# Altium PCB acqboard 3.0.PcbDoc (part 2 of 4)
Units mil, origin at the board's own origin, x right, y up, seen from the top; angles counter-clockwise.
Board outline 6000 x 4000 mil, 4 copper layers (Top Layer, Internal Plane 1, Internal Plane 2, Bottom Layer); 450 components, 328 nets, 1980 pads, 745 vias.
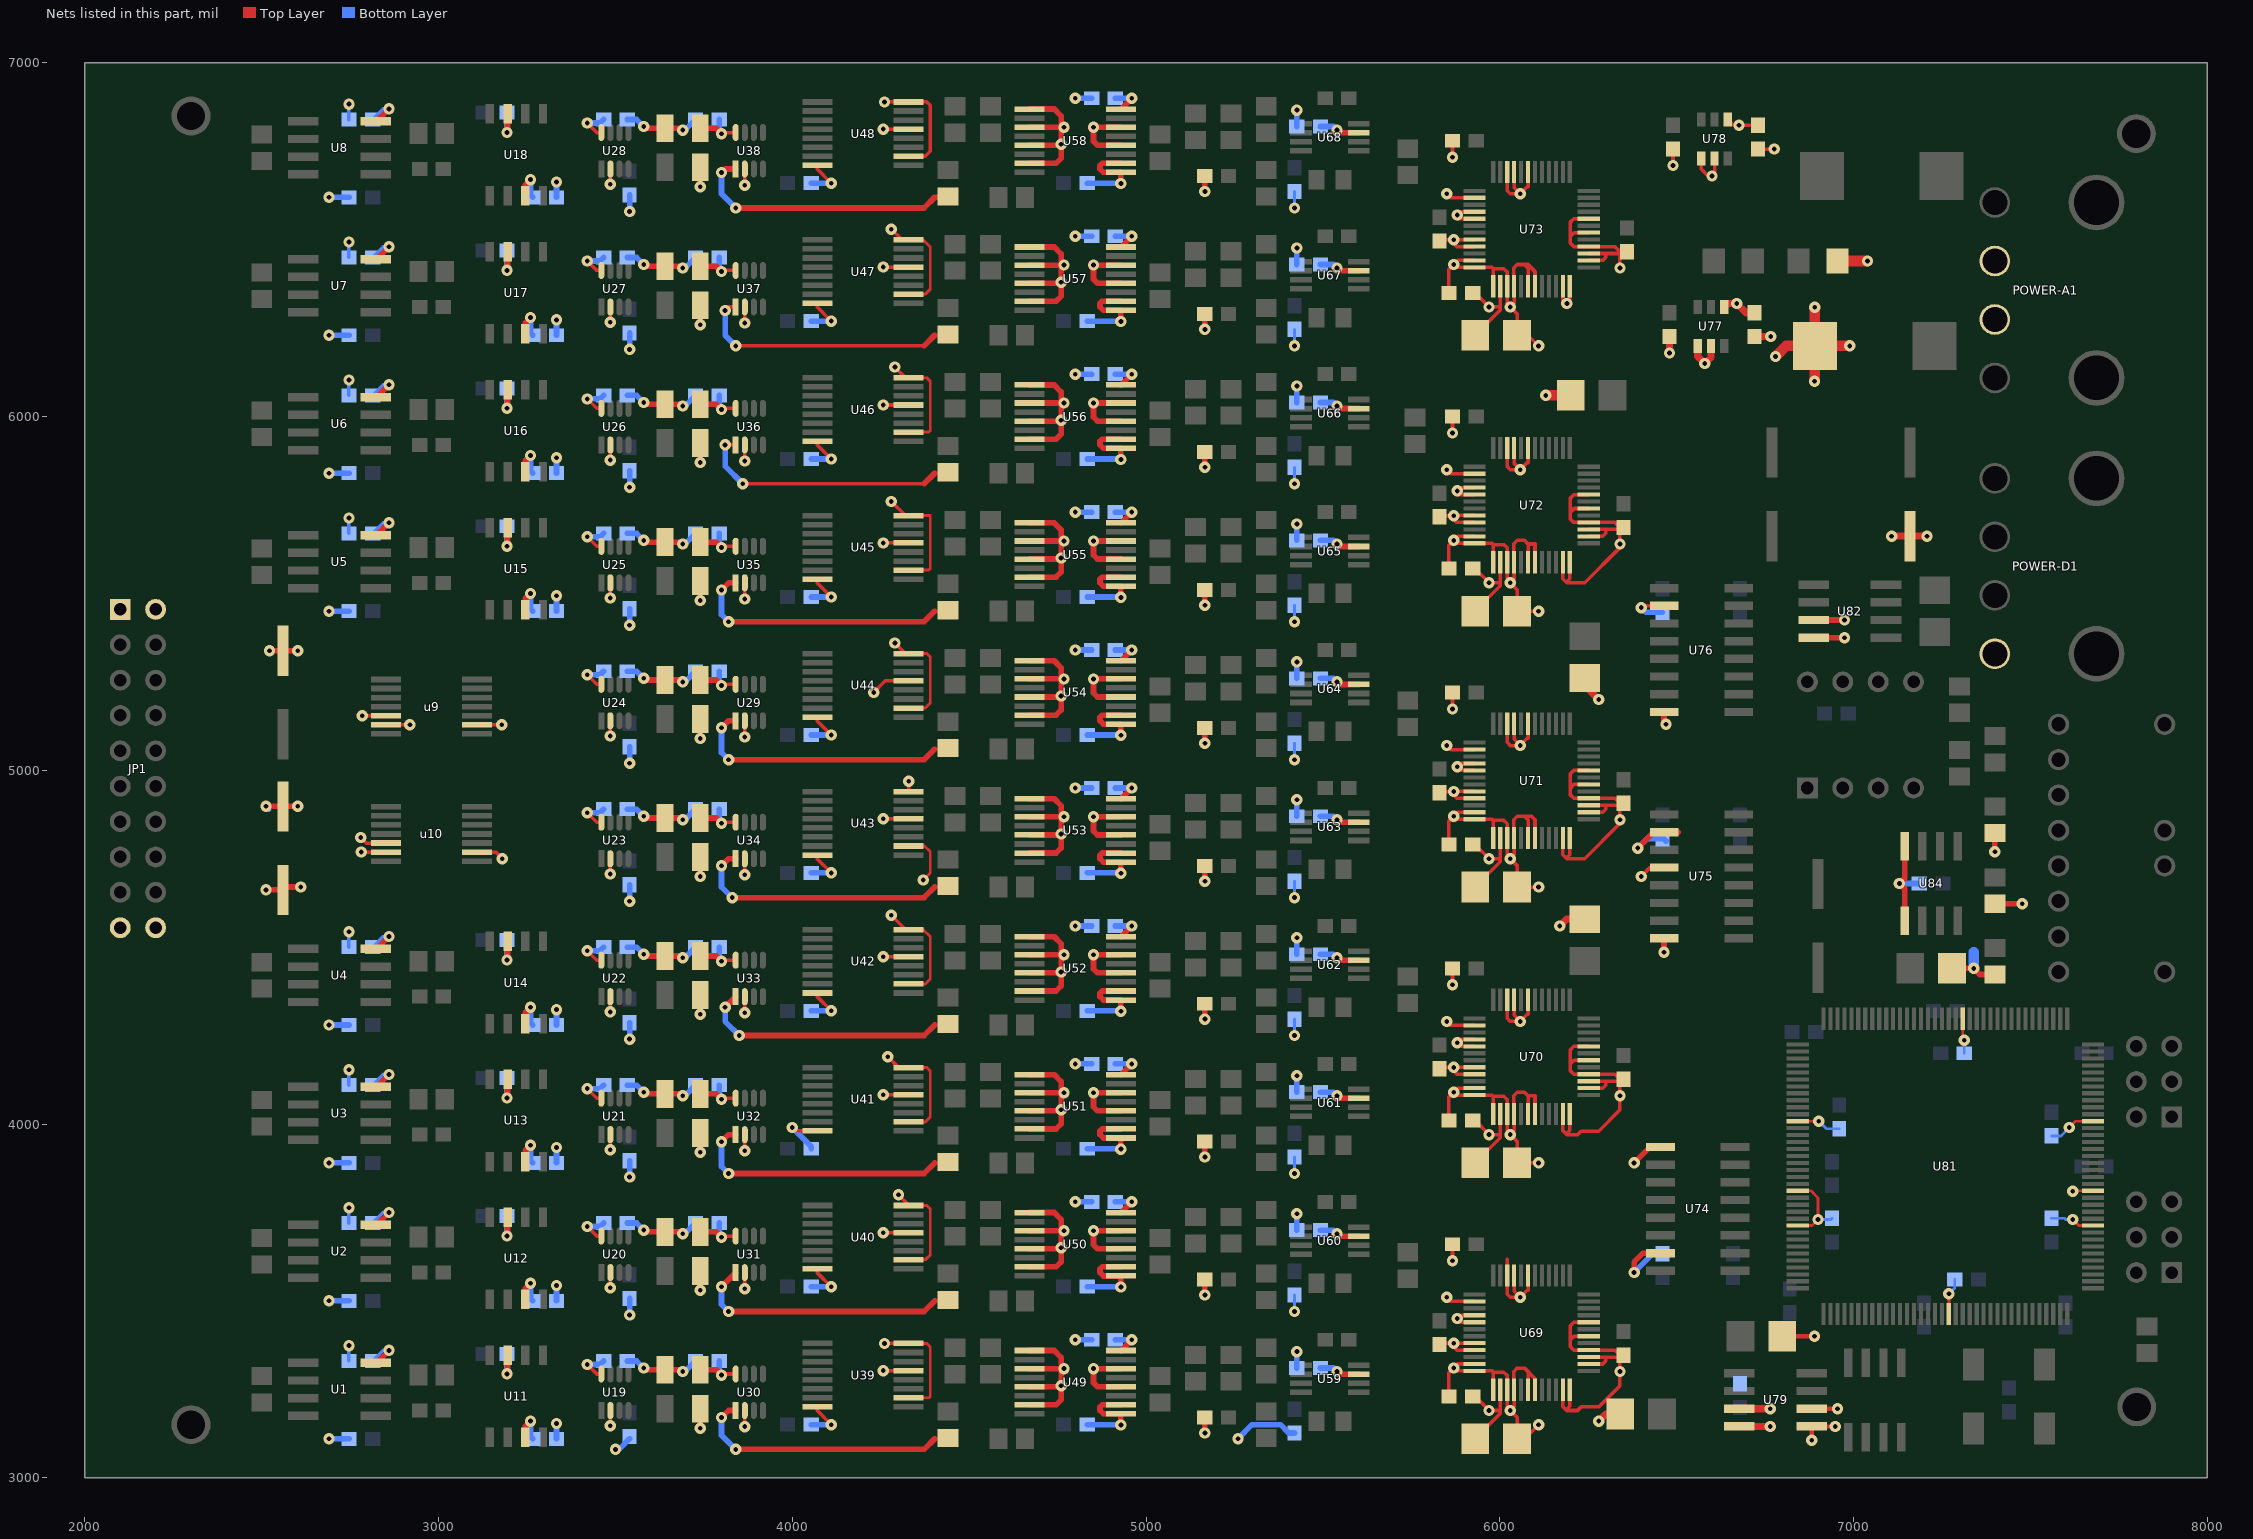
[diagram p4: the nets of this part, all layers, seen from the top]

## Footprints (in the part's own frame and the unit in brackets; to place one, negate y for a bottom-side part, rotate by r counter-clockwise, add the part's x,y. Pads: shape width x height; smd on the part's side, far side on the other; paste and mask are expansions set on the pad) (continued)
TC3528-1411 [mm]
  rect 2x2.2 smd: 1(-1.5,0) 2(1.5,0)
  silkscreen extent -2.9,-1.5 2.4,1.5
TSOT-23-8 [mm]
  rect 1.22x0.43 smd: 1(0,0)
  oval 1.22x0.43 smd: 2(0,-0.65) 3(0,-1.3) 4(0,-1.95) 5(2.62,-1.95) 6(2.62,-1.3) 7(2.62,-0.65) 8(2.62,0)
  silkscreen extent 0.9,-2.35 1.75,0.25
TSSO3X5-G8/X.4 [mm]
  rect 0.4x1.55 smd: 1(-0.975,-2.075) 2(-0.325,-2.075) 3(0.325,-2.075) 4(0.975,-2.075) 5(0.975,2.075) 6(0.325,2.075) 7(-0.325,2.075) 8(-0.975,2.075)
  silkscreen extent -1.85,-2.2 1.55,0.9

## Part data
C1 C2 C92 C96: library part "Cap Pol3", "Polarized Capacitor (Surface Mount)"
C3 C4 C5 C6 C7 C8 C9 C10 C31 C32 C33 C34 C35 C36 C37 C38 C39 C40 C42 C44 C46 C48 C50 C52 C54 C56 C58 C60 C61 C62 C63 C64 C65 C67 C68 C70 C71 C73 C74 C76 C77 C79 C80 C85 C86 C87 C88 C89 C90 C91 C94 C95 C100 C101 C102 C103 C104 C105 C106 C107 C108 C109 C110 C111 C112 C113 C114 C115 C116 C117 C118 C119 C120 C121 C122 C123 C124 C125 C126 C127 C128 C129 C130 C131 C132 C133 C134 C135 C136 C137 C138 C139 C140 C141 C142 C143 C144 C145 C146 C147 C148 C149 C150 C151 C152 C153 C154 C155 C156 C157 C158 C159 C160 C161 C162 C163 C164 C165 C166 C167 C168 C169 C170 C171 C172 C173 C174 C175 C176 C177 C178 C179 C180 C181 C182 C183 C184 C185 C186 C187 C188 C189 C190 C191 C192 C193 C194 C195 C196 C197 C198 C199 C200 C201 C202 C203 C204 C205 C206 C207 C208 C209 C210 C211 C212 C213 C214 C215 C216 C217 C218 C219 C220 C221 C222 C223 C224 C225 C226 C227 C228 C229 C230 C231 C232 C233 C234 C235 C236: "Capacitor"
C11 C12 C13 C14 C15 C16 C17 C18 C19 C20 C21 C22 C23 C24 C25 C26 C27 C28 C29 C30 C66 C69 C72 C75 C78 C81 C82 C83 C84 C93 C97 C98 C99: library part Cap2, "Capacitor"
C41 C43 C45 C47 C49 C51 C53 C55 C57 C59: library part Cap, "Capacitor"
JP1: "Header, 10-Pin, Dual row, Right Angle"
JP2 JP3: "Header, 3-Pin, Dual row"
L1 L2 L3: library part Inductor, "Inductor"
O1: "Epson CMOS/TTL Oscillator"
O2: "Low-cost fiber transmitter"
O3: "Low-cost fiber receiver"
POWER-A1 POWER-D1: "Header, 4-Pin"
R1 R2 R3 R4 R5 R6 R7 R8: library part Res1, "Resistor"
R9 R10 R11 R12 R13 R14 R15 R16 R17 R18 R19 R20 R21 R22 R23 R24 R25 R26 R27 R28 R29 R30 R31 R32 R33 R34 R35 R36 R37 R38 R39 R40 R41 R42 R43 R44 R45 R46 R47 R48 R49 R50 R51 R52 R53 R54 R55 R56 R57 R58 R59 R60 R61 R62 R63 R64 R65 R66 R67 R68 R69 R70 R71 R72 R73 R74 R75 R76 R77 R78 R79 R80 R81 R82 R83 R84 R85 R86 R87 R88 R89 R90 R91 R92 R93 R94 R95 R96 R97 R98 R99 R100 R101 R102 R103 R104 R105 R106 R107 R108 R109 R110 R111 R112 R113 R114 R115 R116 R117 R118 R119: "Resistor"
U1 U2 U3 U4 U5 U6 U7 U8: "AD8221 Precision Instrumentation Amplifier"
u9 u10: "1 pC Charge Injection 100pA leakage CMOS 4-channel mux"
U11 U12 U13 U14 U15 U16 U17 U18: library part OPA227UA, "OPA227UA"
U19 U20 U21 U22 U23 U24 U25 U26 U27 U28 U29 U30 U31 U32 U33 U34 U35 U36 U37 U38: "LTI Digitally Controlled Programmabe Gain Amp"
U39 U40 U41 U42 U43 U44 U45 U46 U47 U48: library part SN74LV595APWR, "8-bit shift register with 3-state output"
U49 U50 U51 U52 U53 U54 U55 U56 U57 U58: "Linear Tech 4-th order linear continuous filter"
U59 U60 U61 U62 U63 U64 U65 U66 U67 U68: library part AD8021, "AD Low-noise, High-Speed Amp for 16-bit applications"
U69 U70 U71 U72 U73: library part AD7655, "AD 4 Channel 1 MSPS 16-bit ADC"
U74 U76: library part IL715-3, "High speed digital coupler"
U75: library part IL716-3, "High speed digital coupler"
U77 U78: library part LT1790
U79 U82: library part TPS775XX, "Fast-transient-response 500 mA low-dropout voltage regulator"
U80: "Xilinx OTP configuration serial prom"
U81: "Xilinx Spartan-IIE 1.8 V FPGA TQ144"
U83: "32K I2C Serial EEPROM"
U84: "Dual Peripheral Driver"

## Free pads (board coordinates)
  round 110 hole 80: 0(2300,3150) 0(2300,6850) 0(7800,6800) 0(7801,3200)

## Via types
v1: diameter 32, hole 13.5, Top Layer to Bottom Layer, 745 vias

## Nets (pads, with @x,y where several pads share a name; then routed paths per layer and width w, separated by ;. In a path a pad name is that pad's centre, name@x,y a point inside that pad or via, vN(x,y) a via of type N, cw(c..) or ccw(c..) an arc to the next point about the centre after c; other vN are vias at no path point)
+1.8VCC: C93.1 C221.1 C223.1 C228.1 C229.1 C232.1 C233.1 U79.5 U79.6 U81.19 U81.46 U81.51 U81.61 U81.88 U81.120 U81.130 U81.135 | length 1149.9
  Top Layer w8: U81.135@6842.68,3712.68 6882.68,3712.68 v1(6900,3730) 6900,3791.1 6880,3811.1 U81.130@6842.68,3811.1 ; U81.120@6842.68,4007.95 v1(6902.05,4007.95) ; U81.19@7269.84,3462.68 7270,3462.84 v1(7270,3520) ; U81.88@7309.21,4297.32 7309.21,4240.79 v1(7313.46,4236.54) ; v1(7610,3990) 7627.95,4007.95 U81.61@7677.32,4007.95 ; v1(7620,3730) 7637.32,3712.68 U81.46@7677.32,3712.68 ; v1(7620,3810) 7621.1,3811.1 U81.51@7677.32,3811.1
  Top Layer w12: C93.1@6799.06,3400 v1(6890,3400) ; v1(6882.36,3105.64) U79.5@6882.36,3145 v1(6949,3145) ; U79.6@6882.36,3195 v1(6955,3195)
  Bottom Layer w8: v1(6900,3730) 6936.54,3730 C221.1@6940,3733.46 ; v1(6902.05,4007.95) 6923.46,3986.54 C223.1@6960,3986.54 ; v1(7270,3520) 7286.54,3536.54 C228.1@7286.54,3560 ; C229.1@7313.46,4200 v1(7313.46,4236.54) ; C232.1@7560,3733.46 7596.54,3733.46 7600,3730 v1(7620,3730) ; C233.1@7560,3966.54 7586.54,3966.54 v1(7610,3990)
+5VCC: C97.1 C98.1 C216.1 C227.1 POWER-D1.4 R113.2 R116.2 R117.1 U79.3 U79.4 U82.3 U82.4 U84.1 U84.8 | length 1032.4
  Top Layer w16: U82.4@6887.64,5375 v1(6975,5375) ; U82.3@6887.64,5425 v1(6975,5425) ; U84.1@7145,4574.69 7145,4665 v1(7130,4680) 7145,4695 U84.8@7145,4785.32 ; C98.1@7279.06,4440 v1(7340,4440) 7357.4,4422.6 R113.2@7400,4422.6 ; R116.2@7400,4622.6 v1(7477.4,4622.6) ; v1(7400,4770) R117.1@7400,4822.6
  Top Layer w20: U79.4@6677.64,3145 v1(6765,3145) ; U79.3@6677.64,3195 v1(6765,3195) ; v1(7108.11,5661.89) v1(7208.11,5661.89)
  Bottom Layer w16: v1(7130,4680) C227.1@7186.54,4680
  Bottom Layer w30: v1(7340,4440) 7340,4485.2
AAIN1: R35.1 U38.1 | length 770.5
  Top Layer w16: v1(3800,6690) 3810,6700 U38.1@3840,6700 ; v1(3840,6590) 4372.6,6590 4402.6,6620 R35.1@4437.4,6620
  Bottom Layer w16: v1(3800,6690) 3800,6630 v1(3840,6590)
AAIN2: R33.1 U37.1 | length 721.6
  Top Layer w10: v1(3810,6300) 3820,6310 U37.1@3840,6310 ; v1(3840,6200) 4372.6,6200
  Top Layer w16: 4372.6,6200 4402.6,6230
  Bottom Layer w16: v1(3810,6300) 3810,6230 v1(3840,6200)
AAIN3: R31.1 U36.1 | length 715.7
  Top Layer w10: v1(3810,5920) U36.1@3840,5920 ; v1(3860,5810) 4372.6,5810
  Top Layer w16: 4372.6,5810 4402.6,5840
  Bottom Layer w16: v1(3810,5920) 3810,5860 v1(3860,5810)
AAIN4: R29.1 U35.1 | length 741.6
  Top Layer w16: v1(3800,5510) 3820,5530 U35.1@3840,5530 ; v1(3820,5420) 4372.6,5420 4402.6,5450
  Bottom Layer w16: v1(3800,5510) 3800,5440 v1(3820,5420)
AAIN5: R27.1 U29.1 | length 741.6
  Top Layer w16: v1(3800,5120) 3820,5140 U29.1@3840,5140 ; v1(3820,5030) 4372.6,5030 4402.6,5060
  Bottom Layer w16: v1(3800,5120) 3800,5050 v1(3820,5030)
AAIN6: R25.1 U34.1 | length 735.7
  Top Layer w16: v1(3800,4730) 3820,4750 U34.1@3840,4750 ; v1(3830,4640) 4372.6,4640 4402.6,4670
  Bottom Layer w16: v1(3800,4730) 3800,4670 v1(3830,4640)
AAIN7: R23.1 U33.1 | length 704
  Top Layer w16: v1(3810,4330) U33.1@3840,4360 ; v1(3850,4250) 4372.6,4250 4402.6,4280
  Bottom Layer w16: v1(3810,4330) 3810,4290 v1(3850,4250)
AAIN8: R21.1 U32.1 | length 741.6
  Top Layer w16: v1(3800,3950) 3820,3970 U32.1@3840,3970 ; v1(3820,3860) 4372.6,3860 4402.6,3890
  Bottom Layer w16: v1(3800,3950) 3800,3880 v1(3820,3860)
AAIN9: R19.1 U31.1 | length 727.3
  Top Layer w16: v1(3800,3540) U31.1@3840,3580 ; v1(3820,3470) 4370,3470 ; 4372.6,3470 4402.6,3500
  Bottom Layer w16: v1(3800,3540) 3800,3490 v1(3820,3470)
AAIN10: R17.1 U30.1 | length 729.9
  Top Layer w16: v1(3800,3170) 3820,3190 U30.1@3840,3190 ; v1(3840,3080) 4372.6,3080 4402.6,3110
  Bottom Layer w16: v1(3800,3170) 3800,3120 v1(3840,3080)
AAOUT1: 
AAOUT2: 
AAOUT2: 
AAOUT3: 
AAOUT3: 
AAOUT4: 
AAOUT4: 
AAOUT5: 
AAOUT5: 
AGND: C1.2 C2.1 C11.1 C12.1 C13.1 C14.1 C15.1 C16.1 C17.1 C18.1 C19.1 C20.1 C21.2 C22.2 C23.2 C24.2 C25.2 C26.2 C27.2 C28.2 C29.2 C30.2 C31.1 C32.1 C33.1 C34.1 C35.1 C36.1 C37.1 C38.1 C39.1 C40.1 C61.1 C62.1 C63.1 C64.1 C65.1 C66.2 C67.2 C68.2 C69.2 C70.2 C71.2 C72.2 C73.2 C74.2 C75.2 C76.2 C77.2 C78.2 C79.2 C80.2 C81.2 C82.2 C83.2 C84.2 C85.2 C86.2 C87.2 C88.2 C89.2 C90.2 C91.2 C94.2 C95.2 C100.2 C101.2 C102.2 C103.2 C104.2 C105.2 C106.2 C107.2 C108.2 C109.2 C110.2 C111.2 C112.2 C113.2 C114.2 C115.2 C116.2 C117.2 C118.2 C119.2 C120.2 C121.2 C122.2 C123.2 C124.2 C125.2 C126.2 C127.2 C128.2 C129.2 C130.2 C131.2 C132.2 C133.2 C134.2 C135.2 C136.2 C137.2 C138.2 C139.2 C140.2 C141.2 C142.1 C143.1 C144.1 C145.1 C146.1 C147.1 C148.1 C149.1 C150.1 C151.1 C152.2 C153.2 C154.2 C155.2 C156.2 C157.2 C158.2 C159.2 C160.2 C161.2 C162.2 C163.2 C164.2 C165.2 C166.2 C167.2 C168.2 C169.2 C170.2 C171.2 C172.1 C173.1 C174.1 C175.1 C176.1 C177.1 C178.1 C179.1 C180.1 C181.1 C182.1 C183.1 C184.1 C185.1 C186.1 C187.1 C188.1 C189.1 C190.1 C191.1 C192.1 C193.1 C194.1 C195.1 C196.1 C197.1 C198.1 C199.1 C200.1 C201.1 C202.1 C203.1 C204.1 C205.1 C206.1 C207.1 C208.1 C209.1 C210.1 C211.1 C212.1 C213.1 C214.2 JP1.1 JP1.2 JP1.19 JP1.20 POWER-A1.2 POWER-A1.3 u9.13 u10.13 U11.3 U12.3 U13.3 U14.3 U15.3 U16.3 U17.3 U18.3 U19.2 U20.2 U21.2 U22.2 U23.2 U24.2 U25.2 U26.2 U27.2 U28.2 U29.2 U30.2 U31.2 U32.2 U33.2 U34.2 U35.2 U36.2 U37.2 U38.2 U39.8 U39.13 U40.8 U40.13 U41.8 U41.13 U42.8 U42.13 U43.8 U43.13 U44.8 U44.13 U45.8 U45.13 U46.8 U46.13 U47.8 U47.13 U48.8 U48.13 U49.1 U49.3 U49.5 U49.7 U49.9 U49.10 U49.12 U49.14 U50.1 U50.3 U50.5 U50.7 U50.9 U50.10 U50.12 U50.14 U51.1 U51.3 U51.5 U51.7 U51.9 U51.10 U51.12 U51.14 U52.1 U52.3 U52.5 U52.7 U52.9 U52.10 U52.12 U52.14 U53.1 U53.3 U53.5 U53.7 U53.9 U53.10 U53.12 U53.14 U54.1 U54.3 U54.5 U54.7 U54.9 U54.10 U54.12 U54.14 U55.1 U55.3 U55.5 U55.7 U55.9 U55.10 U55.12 U55.14 U56.1 U56.3 U56.5 U56.7 U56.9 U56.10 U56.12 U56.14 U57.1 U57.3 U57.5 U57.7 U57.9 U57.10 U57.12 U57.14 U58.1 U58.3 U58.5 U58.7 U58.9 U58.10 U58.12 U58.14 U69.1 U69.3 U69.4 U69.6 U69.7 U69.11 U69.12 U69.14 U69.15 U69.16 U69.18 U69.20 U69.31 U69.33 U69.34 U69.38 U69.40 U69.41 U69.44 U69.45 U69.47 U69.48 U70.1 U70.3 U70.4 U70.6 U70.7 U70.11 U70.12 U70.14 U70.15 U70.16 U70.18 U70.20 U70.31 U70.33 U70.34 U70.38 U70.40 U70.41 U70.44 U70.45 U70.47 U70.48 U71.1 U71.3 U71.4 U71.6 U71.7 U71.11 U71.12 U71.14 U71.15 U71.16 U71.18 U71.20 U71.31 U71.33 U71.34 U71.38 U71.40 U71.41 U71.44 U71.45 U71.47 U71.48 U72.1 U72.3 U72.4 U72.6 U72.7 U72.11 U72.12 U72.14 U72.15 U72.16 U72.18 U72.20 U72.31 U72.33 U72.34 U72.38 U72.40 U72.41 U72.44 U72.45 U72.47 U72.48 U73.1 U73.3 U73.4 U73.6 U73.7 U73.11 U73.12 U73.14 U73.15 U73.16 U73.18 U73.20 U73.31 U73.33 U73.34 U73.38 U73.40 U73.41 U73.44 U73.45 U73.47 U73.48 U74.9 U74.15 U75.2 U75.4 U75.8 U76.2 U76.8 U77.1 U77.2 U78.1 U78.2 | length 33462.4
  Top Layer w8: C78.2@6049.06,6230 6080,6230 v1(6110,6200)
  Top Layer w10: v1(2781.18,4768.82) u10.13@2851.06,4768.82 ; u9.13@2851.06,5128.82 v1(2918.82,5128.82) ; v1(3485.59,3147) U19.2@3485.59,3190 ; v1(3485.59,3537) U20.2@3485.59,3580 ; v1(3485.59,3927) U21.2@3485.59,3970 ; v1(3485.59,4317) U22.2@3485.59,4360 ; v1(3485.59,4707) U23.2@3485.59,4750 ; v1(3485.59,5097) U24.2@3485.59,5140 ; v1(3485.59,5487) U25.2@3485.59,5530 ; v1(3485.59,5877) U26.2@3485.59,5920 ; v1(3485.59,6267) U27.2@3485.59,6310 ; v1(3485.59,6657) U28.2@3485.59,6700 ; v1(3865.59,3144.41) U30.2@3865.59,3190 ; v1(3865.59,3534.41) U31.2@3865.59,3580 ; v1(3865.59,3924.41) U32.2@3865.59,3970 ; v1(3865.59,4314.41) U33.2@3865.59,4360 ; v1(3865.59,4704.41) U34.2@3865.59,4750 ; v1(3865.59,5094.41) U29.2@3865.59,5140 ; v1(3865.59,5484.41) U35.2@3865.59,5530 ; v1(3865.59,5874.41) U36.2@3865.59,5920 ; v1(3865.59,6264.41) U37.2@3865.59,6310 ; v1(3865.59,6654.41) U38.2@3865.59,6700 ; v1(4000,3990) 4009.57,3980.43 U41.8@4071.06,3980.43 ; U39.8@4071.06,3200.43 4071.06,3188.94 v1(4110,3150) ; U40.8@4071.06,3590.43 4071.06,3578.94 v1(4110,3540) ; U42.8@4071.06,4370.43 4071.06,4358.94 v1(4110,4320) ; U43.8@4071.06,4760.43 4071.06,4748.94 v1(4110,4710) ; U44.8@4071.06,5150.43 4071.06,5138.94 v1(4110,5100) ; U45.8@4071.06,5540.43 4071.06,5528.94 v1(4110,5490) ; U46.8@4071.06,5930.43 4071.06,5918.94 v1(4110,5880) ; U47.8@4071.06,6320.43 4071.06,6308.94 v1(4110,6270) ; U48.8@4071.06,6710.43 4071.06,6698.94 v1(4110,6660) ; v1(4230,5220) 4262.8,5252.8 U44.13@4328.94,5252.8 ; v1(4257.21,3302.8) U39.13@4328.94,3302.8 ; v1(4257.21,3692.8) U40.13@4328.94,3692.8 ; v1(4257.21,4082.8) U41.13@4328.94,4082.8 ; v1(4257.21,4472.8) U42.13@4328.94,4472.8 ; v1(4257.21,4862.8) U43.13@4328.94,4862.8 ; v1(4257.21,5642.8) U45.13@4328.94,5642.8 ; v1(4257.21,6032.8) U46.13@4328.94,6032.8 ; v1(4257.21,6422.8) U47.13@4328.94,6422.8 ; v1(4257.21,6812.8) U48.13@4328.94,6812.8 ; C61.1@5830,3376.54 5833.46,3380 v1(5870,3380) ; C62.1@5830,4156.54 5833.46,4160 v1(5870,4160) ; C63.1@5830,4936.54 5833.46,4940 v1(5870,4940) ; C64.1@5830,5716.54 5833.46,5720 v1(5870,5720) ; C65.1@5830,6496.54 5833.46,6500 v1(5870,6500) ; v1(5850,3510) 5861.42,3498.58 U69.38@5928.58,3498.58 ; v1(5850,4290) 5861.42,4278.58 U70.38@5928.58,4278.58 ; v1(5850,5070) 5861.42,5058.58 U71.38@5928.58,5058.58 ; v1(5850,5850) 5861.42,5838.58 U72.38@5928.58,5838.58 ; v1(5850,6630) 5861.42,6618.58 U73.38@5928.58,6618.58 ; C67.2@5856.54,3230 5856.54,3296.54 5881.42,3321.42 U69.47@5928.58,3321.42 ; C70.2@5856.54,4010 5856.54,4076.54 5881.42,4101.42 U70.47@5928.58,4101.42 ; C73.2@5856.54,4790 5856.54,4856.54 5881.42,4881.42 U71.47@5928.58,4881.42 ; C76.2@5856.54,5570 5856.54,5636.54 5881.42,5661.42 U72.47@5928.58,5661.42 ; C79.2@5856.54,6350 5856.54,6416.54 5881.42,6441.42 U73.47@5928.58,6441.42 ; v1(5866.54,3613.46) C68.2@5866.54,3660 ; v1(5866.54,4393.46) C71.2@5866.54,4440 ; v1(5866.54,5173.46) C74.2@5866.54,5220 ; v1(5866.54,5953.46) C77.2@5866.54,6000 ; v1(5866.54,6733.46) C80.2@5866.54,6780 ; v1(5870,3310) 5878.27,3301.73 5978.27,3301.73 5981.73,3298.27 ; v1@5870,3370 5879.21,3360.79 U69.45@5928.58,3360.79 ; v1(5870,4090) 5878.27,4081.73 5978.27,4081.73 5981.73,4078.27 ; v1@5870,4150 5879.21,4140.79 U70.45@5928.58,4140.79 ; v1(5870,4870) 5878.27,4861.73 5978.27,4861.73 5981.73,4858.27 ; v1@5870,4930 5879.21,4920.79 U71.45@5928.58,4920.79 ; v1(5870,5650) 5878.27,5641.73 5978.27,5641.73 5981.73,5638.27 ; v1@5870,5710 5879.21,5700.79 U72.45@5928.58,5700.79 ; v1(5870,6430) 5878.27,6421.73 5978.27,6421.73 5981.73,6418.27 ; v1@5870,6490 5879.21,6480.79 U73.45@5928.58,6480.79 ; v1@5870.47,3380.47 U69.44@5928.58,3380.47 ; v1@5870.47,4160.47 U70.44@5928.58,4160.47 ; v1@5870.47,4940.47 U71.44@5928.58,4940.47 ; v1@5870.47,5720.47 U72.44@5928.58,5720.47 ; v1@5870.47,6500.47 U73.44@5928.58,6500.47 ; v1(5880,3450) v1@5870,3450 ; v1(5880,4230) v1@5870,4230 ; v1(5880,5010) v1@5870,5010 ; v1(5880,5790) v1@5870,5790 ; v1(5880,6570) v1@5870,6570 ; U69.41@5928.58,3439.53 5880.47,3439.53 v1@5870,3450 ; U69.40@5928.58,3459.21 5879.21,3459.21 v1@5870,3450 ; U70.41@5928.58,4219.53 5880.47,4219.53 v1@5870,4230 ; U70.40@5928.58,4239.21 5879.21,4239.21 v1@5870,4230 ; U71.41@5928.58,4999.53 5880.47,4999.53 v1@5870,5010 ; U71.40@5928.58,5019.21 5879.21,5019.21 v1@5870,5010 ; U72.41@5928.58,5779.53 5880.47,5779.53 v1@5870,5790 ; U72.40@5928.58,5799.21 5879.21,5799.21 v1@5870,5790 ; U73.41@5928.58,6559.53 5880.47,6559.53 v1@5870,6570 ; U73.40@5928.58,6579.21 5879.21,6579.21 v1@5870,6570 ; U69.1@5981.73,3248.58 5981.73,3298.27 ; U70.1@5981.73,4028.58 5981.73,4078.27 ; U71.1@5981.73,4808.58 5981.73,4858.27 ; U72.1@5981.73,5588.58 5981.73,5638.27 ; U73.1@5981.73,6368.58 5981.73,6418.27 ; 6021.1,3617.06 6021.1,3518.9 6030,3510 v1(6058.22,3510) ; U70.34@6021.1,4351.42 6021.1,4298.9 6030,4290 v1(6058.22,4290) ; U71.34@6021.1,5131.42 6021.1,5078.9 6030,5070 v1(6058.22,5070) ; U72.34@6021.1,5911.42 6021.1,5858.9 6030,5850 v1(6058.22,5850) ; U73.34@6021.1,6691.42 6021.1,6638.9 6030,6630 v1(6058.22,6630) ; v1(6030,3190) 6040.79,3200.79 U69.4@6040.79,3248.58 6040,3249.37 6040,3300 6050,3310 6070,3310 6099.84,3280.16 ; v1(6030,3970) 6040.79,3980.79 U70.4@6040.79,4028.58 6040,4029.37 6040,4080 6050,4090 6070,4090 6080.16,4079.84 ; v1(6030,4750) 6040.79,4760.79 U71.4@6040.79,4808.58 6040,4809.37 6040,4860 6050,4870 6090,4870 6099.84,4860.16 U71.7@6099.84,4808.58 ; v1(6030,5530) 6040.79,5540.79 U72.4@6040.79,5588.58 6040,5589.37 6040,5640 6050,5650 6070,5650 6080.16,5639.84 ; v1(6030,6310) 6040.79,6320.79 U73.4@6040.79,6368.58 6040,6369.37 6040,6420 6050,6430 6080,6430 6099.84,6410.16 U73.7@6099.84,6368.58 ; U69.33@6040.79,3571.42 6040.79,3527.43 v1(6058.22,3510) ; U70.33@6040.79,4351.42 6040.79,4307.43 v1(6058.22,4290) ; U71.33@6040.79,5131.42 6040.79,5087.43 v1(6058.22,5070) ; U72.33@6040.79,5911.42 6040.79,5867.43 v1(6058.22,5850) ; U73.33@6040.79,6691.42 6040.79,6647.43 v1(6058.22,6630) ; C78.2@6049.06,6230 6049.06,6290.94 6021.1,6318.9 6021.1,6408.9 6011.73,6418.27 5981.73,6418.27 ; 6070,4870 6080.16,4859.84 U71.6@6080.16,4808.58 ; 6070,6430 6080.16,6419.84 U73.6@6080.16,6368.58 ; U69.6@6080.16,3248.58 6080.16,3299.84 ; U69.31@6080.16,3571.42 6080.16,3530.16 6078.38,3530.16 v1(6058.22,3510) ; U70.6@6080.16,4028.58 6080.16,4079.84 ; U70.31@6080.16,4351.42 6080.16,4310.16 6078.38,4310.16 v1(6058.22,4290) ; U71.31@6080.16,5131.42 6080.16,5090.16 6078.38,5090.16 v1(6058.22,5070) ; U72.6@6080.16,5588.58 6080.16,5639.84 ; U72.31@6080.16,5911.42 6080.16,5870.16 6078.38,5870.16 v1(6058.22,5850) ; U73.31@6080.16,6691.42 6080.16,6650.16 6078.38,6650.16 v1(6058.22,6630) ; U70.7@6099.84,4028.58 6099.84,4080.16 6099.53,4079.84 6080.16,4079.84 ; U72.7@6099.84,5588.58 6099.84,5640.16 6099.53,5639.84 6080.16,5639.84 ; v1(6110,3150) 6070,3110 C66.2@6049.06,3110 6049.06,3170.94 6021.1,3198.9 6021.1,3288.9 6011.73,3298.27 5981.73,3298.27 ; v1(6110,3890) C69.2@6049.06,3890 6049.06,3950.94 6021.1,3978.9 6021.1,4068.9 6011.73,4078.27 5981.73,4078.27 ; v1(6110,4670) C72.2@6049.06,4670 6049.06,4730.94 6021.1,4758.9 6021.1,4848.9 6011.73,4858.27 5981.73,4858.27 ; v1(6110,5450) C75.2@6049.06,5450 6049.06,5510.94 6021.1,5538.9 6021.1,5628.9 6011.73,5638.27 5981.73,5638.27 ; U69.11@6178.58,3248.58 6178.58,3201.42 6190,3190 ; U70.11@6178.58,4028.58 6178.58,3981.42 6190,3970 ; U71.11@6178.58,4808.58 6178.58,4761.42 6190,4750 ; U72.11@6178.58,5588.58 6178.58,5541.42 6190,5530 ; U73.11@6178.58,6368.58 6178.58,6321.42 6190,6310 v1(6190,6320) ; v1@6193.27,6316.73 6198.27,6321.73 U73.12@6198.27,6368.58 ; U69.12@6198.27,3248.58 6198.27,3201.73 6190,3193.46 6190,3190 ; U70.12@6198.27,4028.58 6198.27,3981.73 6190,3973.46 6190,3970 ; U71.12@6198.27,4808.58 6198.27,4761.73 6190,4753.46 6190,4750 ; U72.12@6198.27,5588.58 6198.27,5541.73 6190,5533.46 6190,5530 ; 6200,3390 6210.16,3400.16 U69.18@6251.42,3400.16 ; 6200,4170 6210.16,4180.16 U70.18@6251.42,4180.16 ; 6200,4950 6210.16,4960.16 U71.18@6251.42,4960.16 ; 6200,5730 6210.16,5740.16 U72.18@6251.42,5740.16 ; 6200,6510 6210.16,6520.16 U73.18@6251.42,6520.16 ; U69.14@6251.42,3321.42 6291.42,3321.42 6300,3330 6300,3341.1 ; U69.15@6251.42,3341.1 6334.57,3341.1 C85.2@6340,3346.54 ; U69.20@6251.42,3439.53 6209.53,3439.53 6200,3430 6200,3370 6209.21,3360.79 6325.75,3360.79 C85.2@6340,3346.54 ; U70.14@6251.42,4101.42 6291.42,4101.42 6300,4110 6300,4121.1 ; U70.15@6251.42,4121.1 6334.57,4121.1 C86.2@6340,4126.54 ; U70.20@6251.42,4219.53 6209.53,4219.53 6200,4210 6200,4150 6209.21,4140.79 6325.75,4140.79 C86.2@6340,4126.54 ; U71.14@6251.42,4881.42 6291.42,4881.42 6300,4890 6300,4901.1 ; U71.15@6251.42,4901.1 6334.57,4901.1 C87.2@6340,4906.54 ; U71.20@6251.42,4999.53 6209.53,4999.53 6200,4990 6200,4930 6209.21,4920.79 6325.75,4920.79 C87.2@6340,4906.54 ; U72.14@6251.42,5661.42 6291.42,5661.42 6300,5670 6300,5681.1 ; U72.15@6251.42,5681.1 6334.57,5681.1 C88.2@6340,5686.54 ; U72.20@6251.42,5779.53 6209.53,5779.53 6200,5770 6200,5710 6209.21,5700.79 6325.75,5700.79 C88.2@6340,5686.54 ; U73.14@6251.42,6441.42 6291.42,6441.42 6300,6450 6300,6461.1 ; U73.15@6251.42,6461.1 6334.57,6461.1 6340,6466.54 ; U73.20@6251.42,6559.53 6209.53,6559.53 6200,6550 6200,6490 6209.21,6480.79 6325.75,6480.79 6340,6466.54 ; v1(6340,6420) 6340,6466.54 ; v1(6400,4700) 6425,4725 U75.4@6464.68,4725 ; v1(6400,5460) 6405,5465 U76.2@6464.68,5465 ; v1(6490,6710) C91.2@6490,6756.54 ; U78.1@6570,6730 6570,6700 v1@6590,6680 ; v1(6600,6680) 6607.4,6687.4 U78.2@6607.4,6730 ; C95.2@6730,6756.54 v1(6776.54,6756.54) ; 6190,3190 6220,3190 6230,3200 6280,3200 6340,3260 C85.2@6340,3346.54 ; 6190,3970 6220,3970 6230,3980 6280,3980 6340,4040 C86.2@6340,4126.54 ; 6190,4750 6240,4750 6340,4850 C87.2@6340,4906.54 ; 6190,5530 6240,5530 6340,5630 C88.2@6340,5686.54
  Top Layer w16: v1(2511.89,4898.11) v1(2601.89,4898.11) ; v1(2521.89,5338.11) v1(2601.89,5338.11) ; v1(3193.46,3293.46) 3195,3295 U11.3@3195,3346.14 ; v1(3193.46,3683.46) 3195,3685 U12.3@3195,3736.14 ; v1(3193.46,4073.46) 3195,4075 U13.3@3195,4126.14 ; v1(3193.46,4463.46) 3195,4465 U14.3@3195,4516.14 ; v1(3193.46,5633.46) 3195,5635 U15.3@3195,5686.14 ; v1(3193.46,6023.46) 3195,6025 U16.3@3195,6076.14 ; v1(3193.46,6413.46) 3195,6415 U17.3@3195,6466.14 ; v1(3193.46,6803.46) 3195,6805 U18.3@3195,6856.14 ; v1(3580,3310) 3584.88,3305.12 3684.88,3305.12 v1(3690,3300) ; v1(3580,3700) 3584.88,3695.12 3684.88,3695.12 v1(3690,3690) ; v1(3580,4090) 3584.88,4085.12 3684.88,4085.12 v1(3690,4080) ; v1(3580,4480) 3584.88,4475.12 3684.88,4475.12 v1(3690,4470) ; v1(3580,4870) 3584.88,4865.12 3684.88,4865.12 v1(3690,4860) ; v1(3580,5260) 3584.88,5255.12 3684.88,5255.12 v1(3690,5250) ; v1(3580,5650) 3584.88,5645.12 3684.88,5645.12 v1(3690,5640) ; v1(3580,6040) 3584.88,6035.12 3684.88,6035.12 v1(3690,6030) ; v1(3580,6430) 3584.88,6425.12 3684.88,6425.12 v1(3690,6420) ; v1(3580,6820) 3584.88,6815.12 3684.88,6815.12 v1(3690,6810) ; v1(3740,3140) C21.2@3740,3194.88 ; v1(3740,3530) C22.2@3740,3584.88 ; v1(3740,3920) C23.2@3740,3974.88 ; v1(3740,4310) C24.2@3740,4364.88 ; v1(3740,4700) C25.2@3740,4754.88 ; v1(3740,5090) C26.2@3740,5144.88 ; v1(3740,5480) C27.2@3740,5534.88 ; v1(3740,5870) C28.2@3740,5924.88 ; v1(3740,6260) C29.2@3740,6314.88 ; v1(3740,6650) C30.2@3740,6704.88 ; U49.7@4671.06,3206.03 4746.02,3206.02 4760,3220 4760,3340 4740.43,3359.57 U49.1@4671.06,3359.57 ; U49.5@4671.06,3257.21 4757.21,3257.21 v1(4760,3260) ; U49.3@4671.06,3308.39 v1(4768.39,3308.39) ; U50.7@4671.06,3596.03 4746.02,3596.02 4760,3610 4760,3730 4740.43,3749.57 U50.1@4671.06,3749.57 ; U50.5@4671.06,3647.21 4757.21,3647.21 v1(4760,3650) ; U50.3@4671.06,3698.39 v1(4768.39,3698.39) ; U51.7@4671.06,3986.03 4746.02,3986.02 4760,4000 4760,4120 4740.43,4139.57 U51.1@4671.06,4139.57 ; U51.5@4671.06,4037.21 4757.21,4037.21 v1(4760,4040) ; U51.3@4671.06,4088.39 v1(4768.39,4088.39) ; U52.7@4671.06,4376.03 4746.02,4376.02 4760,4390 4760,4510 4740.43,4529.57 U52.1@4671.06,4529.57 ; U52.5@4671.06,4427.21 4757.21,4427.21 v1(4760,4430) ; U52.3@4671.06,4478.39 v1(4768.39,4478.39) ; U53.7@4671.06,4766.03 4746.02,4766.02 4760,4780 4760,4900 4740.43,4919.57 U53.1@4671.06,4919.57 ; U53.5@4671.06,4817.21 4757.21,4817.21 v1(4760,4820) ; U53.3@4671.06,4868.39 v1(4768.39,4868.39) ; U54.7@4671.06,5156.03 4746.02,5156.02 4760,5170 4760,5290 4740.43,5309.57 U54.1@4671.06,5309.57 ; U54.5@4671.06,5207.21 4757.21,5207.21 v1(4760,5210) ; U54.3@4671.06,5258.39 v1(4768.39,5258.39) ; U55.7@4671.06,5546.03 4746.02,5546.02 4760,5560 4760,5680 4740.43,5699.57 U55.1@4671.06,5699.57 ; U55.5@4671.06,5597.21 4757.21,5597.21 v1(4760,5600) ; U55.3@4671.06,5648.39 v1(4768.39,5648.39) ; U56.7@4671.06,5936.03 4746.02,5936.02 4760,5950 4760,6070 4740.43,6089.57 U56.1@4671.06,6089.57 ; U56.5@4671.06,5987.21 4757.21,5987.21 v1(4760,5990) ; U56.3@4671.06,6038.39 v1(4768.39,6038.39) ; U57.7@4671.06,6326.03 4746.02,6326.02 4760,6340 4760,6460 4740.43,6479.57 U57.1@4671.06,6479.57 ; U57.5@4671.06,6377.21 4757.21,6377.21 v1(4760,6380) ; U57.3@4671.06,6428.39 v1(4768.39,6428.39) ; U58.7@4671.06,6716.02 4746.02,6716.02 4760,6730 4760,6850 4740.43,6869.57 U58.1@4671.06,6869.57 ; U58.5@4671.06,6767.21 4757.21,6767.21 v1(4760,6770) ; U58.3@4671.06,6818.39 v1(4768.39,6818.39) ; v1(4928.94,3148.94) U49.9@4928.94,3180.43 4879.57,3180.43 4870,3190 4870,3200 4876.02,3206.02 U49.10@4928.94,3206.03 ; U49.12@4928.94,3257.21 4862.8,3257.21 4851.61,3268.39 v1(4851.61,3308.39) U49.14@4928.94,3308.39 ; v1(4928.94,3538.94) U50.9@4928.94,3570.43 4879.57,3570.43 4870,3580 4870,3590 4876.02,3596.02 U50.10@4928.94,3596.03 ; U50.12@4928.94,3647.21 4862.8,3647.21 4851.61,3658.39 v1(4851.61,3698.39) U50.14@4928.94,3698.39 ; v1(4928.94,3928.94) U51.9@4928.94,3960.43 4879.57,3960.43 4870,3970 4870,3980 4876.02,3986.02 U51.10@4928.94,3986.03 ; U51.12@4928.94,4037.21 4862.8,4037.21 4851.61,4048.39 v1(4851.61,4088.39) U51.14@4928.94,4088.39 ; v1(4928.94,4318.94) U52.9@4928.94,4350.43 4879.57,4350.43 4870,4360 4870,4370 4876.02,4376.02 U52.10@4928.94,4376.03 ; U52.12@4928.94,4427.21 4862.8,4427.21 4851.61,4438.39 v1(4851.61,4478.39) U52.14@4928.94,4478.39 ; v1(4928.94,4708.94) U53.9@4928.94,4740.43 4879.57,4740.43 4870,4750 4870,4760 4876.02,4766.02 U53.10@4928.94,4766.03 ; U53.12@4928.94,4817.21 4862.8,4817.21 4851.61,4828.39 v1(4851.61,4868.39) U53.14@4928.94,4868.39 ; v1(4928.94,5098.94) U54.9@4928.94,5130.43 4879.57,5130.43 4870,5140 4870,5150 4876.02,5156.02 U54.10@4928.94,5156.03 ; U54.12@4928.94,5207.21 4862.8,5207.21 4851.61,5218.39 v1(4851.61,5258.39) U54.14@4928.94,5258.39 ; v1(4928.94,5488.94) U55.9@4928.94,5520.43 4879.57,5520.43 4870,5530 4870,5540 4876.02,5546.02 U55.10@4928.94,5546.03 ; U55.12@4928.94,5597.21 4862.8,5597.21 4851.61,5608.39 v1(4851.61,5648.39) U55.14@4928.94,5648.39 ; v1(4928.94,5878.94) U56.9@4928.94,5910.43 4879.57,5910.43 4870,5920 4870,5930 4876.02,5936.02 U56.10@4928.94,5936.03 ; U56.12@4928.94,5987.21 4862.8,5987.21 4851.61,5998.39 v1(4851.61,6038.39) U56.14@4928.94,6038.39 ; v1(4928.94,6268.94) U57.9@4928.94,6300.43 4879.57,6300.43 4870,6310 4870,6320 4876.02,6326.02 U57.10@4928.94,6326.03 ; U57.12@4928.94,6377.21 4862.8,6377.21 4851.61,6388.39 v1(4851.61,6428.39) U57.14@4928.94,6428.39 ; v1(4928.94,6658.94) U58.9@4928.94,6690.43 4879.57,6690.43 4870,6700 4870,6710 4876.02,6716.02 U58.10@4928.94,6716.02 ; U58.12@4928.94,6767.21 4862.8,6767.21 4851.61,6778.39 v1(4851.61,6818.39) U58.14@4928.94,6818.39 ; v1(5166.54,3126.54) C31.1@5166.54,3170 ; v1(5166.54,3516.54) C32.1@5166.54,3560 ; v1(5166.54,3906.54) C33.1@5166.54,3950 ; v1(5166.54,4296.54) C34.1@5166.54,4340 ; v1(5166.54,4686.54) C35.1@5166.54,4730 ; v1(5166.54,5076.54) C36.1@5166.54,5120 ; v1(5166.54,5466.54) C37.1@5166.54,5510 ; v1(5166.54,5856.54) C38.1@5166.54,5900 ; v1(5166.54,6246.54) C39.1@5166.54,6290 ; v1(5166.54,6636.54) C40.1@5166.54,6680 ; v1(6380,3580) 6380,3610 6405,3635 U74.15@6454.69,3635 ; v1(6380,3890) 6425,3935 U74.9@6454.69,3935 ; v1@6400,4790 6435,4825 U75.2@6505,4825 ; v1(6464.68,4485.32) U75.8@6464.68,4525 ; U76.8@6464.68,5165 6464.68,5135.32 v1(6470,5130)
  Top Layer w20: v1(6170,4560) 6189.06,4579.06 C81.2@6240,4579.06 ; C82.2@6240,5260.94 6240,5240 v1(6280,5200) ; v1(6280,3160) 6300,3180 C84.2@6340.94,3180 ; v1(6480,6180) C90.2@6480,6220 ; U77.1@6560,6200 6560,6170 v1(6580,6150) 6597.4,6167.4 U77.2@6597.4,6200 ; C94.2@6720,6226.54 v1(6766.54,6226.54)
  Top Layer w30: v1(6130,6060) C83.2@6214.02,6060
  Bottom Layer w8: v1(5420,3470) C194.1@5420,3516.54 ; v1(5420,3860) C196.1@5420,3906.54 ; v1(5420,4250) C198.1@5420,4296.54 ; v1(5420,4640) C200.1@5420,4686.54 ; v1(5420,5030) C202.1@5420,5076.54 ; v1(5420,5420) C204.1@5420,5466.54 ; v1(5420,5810) C206.1@5420,5856.54 ; v1(5420,6200) C208.1@5420,6246.54 ; v1(5420,6590) C210.1@5420,6636.54
  Bottom Layer w10: C101.2@2746.54,3330 v1(2746.54,3373.46) ; C103.2@2746.54,3720 v1(2746.54,3763.46) ; C105.2@2746.54,4110 v1(2746.54,4153.46) ; C107.2@2746.54,4500 v1(2746.54,4543.46) ; C109.2@2746.54,5670 v1(2746.54,5713.46) ; C111.2@2746.54,6060 v1(2746.54,6103.46) ; C113.2@2746.54,6450 v1(2746.54,6493.46) ; C115.2@2746.54,6840 v1(2746.54,6883.46)
  Bottom Layer w16: v1(2511.89,4898.11) v1@2520,4890 ; v1(2690,3110) C100.2@2746.54,3110 ; v1(2690,3500) C102.2@2746.54,3500 ; v1(2690,3890) C104.2@2746.54,3890 ; v1(2690,4280) C106.2@2746.54,4280 ; v1(2690,5450) C108.2@2746.54,5450 ; v1(2690,5840) C110.2@2746.54,5840 ; v1(2690,6230) C112.2@2746.54,6230 ; v1(2690,6620) C114.2@2746.54,6620 ; v1(3193.46,3293.46) C116.2@3193.46,3350 ; v1(3193.46,3683.46) C117.2@3193.46,3740 ; v1(3193.46,4073.46) C118.2@3193.46,4130 ; v1(3193.46,4463.46) C119.2@3193.46,4520 ; v1(3193.46,5633.46) C120.2@3193.46,5690 ; v1(3193.46,6023.46) C121.2@3193.46,6080 ; v1(3193.46,6413.46) C122.2@3193.46,6470 ; v1(3193.46,6803.46) C123.2@3193.46,6860 ; C124.2@3333.46,3110 v1(3333.46,3153.46) ; C125.2@3333.46,3500 v1(3333.46,3543.46) ; C126.2@3333.46,3890 v1(3333.46,3933.46) ; C127.2@3333.46,4280 v1(3333.46,4323.46) ; C128.2@3333.46,5450 v1(3333.46,5493.46) ; C129.2@3333.46,5840 v1(3333.46,5883.46) ; C130.2@3333.46,6230 v1(3333.46,6273.46) ; C131.2@3333.46,6620 v1(3333.46,6663.46) ; v1(3500,3080) 3510,3080 C142.1@3540,3110 ; C132.2@3533.46,3330 3560,3330 v1(3580,3310) ; C133.2@3533.46,3720 3560,3720 v1(3580,3700) ; C134.2@3533.46,4110 3560,4110 v1(3580,4090) ; C135.2@3533.46,4500 3560,4500 v1(3580,4480) ; C136.2@3533.46,4890 3560,4890 v1(3580,4870) ; C137.2@3533.46,5280 3560,5280 v1(3580,5260) ; C138.2@3533.46,5670 3560,5670 v1(3580,5650) ; C139.2@3533.46,6060 3560,6060 v1(3580,6040) ; C140.2@3533.46,6450 3560,6450 v1(3580,6430) ; C141.2@3533.46,6840 3560,6840 v1(3580,6820) ; v1(3540,3460) C143.1@3540,3506.54 ; v1(3540,3850) C144.1@3540,3896.54 ; v1(3540,4240) C145.1@3540,4286.54 ; v1(3540,4630) C146.1@3540,4676.54 ; v1(3540,5020) C147.1@3540,5066.54 ; v1(3540,5410) C148.1@3540,5456.54 ; v1(3540,5800) C149.1@3540,5846.54 ; v1(3540,6190) C150.1@3540,6236.54 ; v1(3540,6580) C151.1@3540,6626.54 ; v1(3690,3300) 3696.54,3300 C152.2@3726.54,3330 ; v1(3690,3690) 3696.54,3690 C153.2@3726.54,3720 ; v1(3690,4080) 3696.54,4080 C154.2@3726.54,4110 ; v1(3690,4470) 3696.54,4470 C155.2@3726.54,4500 ; v1(3690,4860) 3696.54,4860 C156.2@3726.54,4890 ; v1(3690,5250) 3696.54,5250 C157.2@3726.54,5280 ; v1(3690,5640) 3696.54,5640 C158.2@3726.54,5670 ; v1(3690,6030) 3696.54,6030 C159.2@3726.54,6060 ; v1(3690,6420) 3696.54,6420 C160.2@3726.54,6450 ; v1(3690,6810) 3696.54,6810 C161.2@3726.54,6840 ; v1(4000,3990) 4053.46,3936.54 C164.2@4053.46,3930 ; C162.2@4053.46,3150 v1(4110,3150) ; C163.2@4053.46,3540 v1(4110,3540) ; C165.2@4053.46,4320 v1(4110,4320) ; C166.2@4053.46,4710 v1(4110,4710) ; C167.2@4053.46,5100 v1(4110,5100) ; C168.2@4053.46,5490 v1(4110,5490) ; C169.2@4053.46,5880 v1(4110,5880) ; C170.2@4053.46,6270 v1(4110,6270) ; C171.2@4053.46,6660 v1(4110,6660) ; v1(4800,3390) C182.1@4846.54,3390 ; v1(4800,3780) C183.1@4846.54,3780 ; v1(4800,4170) C184.1@4846.54,4170 ; v1(4800,4560) C185.1@4846.54,4560 ; v1(4800,4950) C186.1@4846.54,4950 ; v1(4800,5340) C187.1@4846.54,5340 ; v1(4800,5730) C188.1@4846.54,5730 ; v1(4800,6120) C189.1@4846.54,6120 ; v1(4800,6510) C190.1@4846.54,6510 ; v1(4800,6900) C191.1@4846.54,6900 ; C172.1@4833.46,3150 4927.87,3150 v1(4928.94,3148.94) ; C173.1@4833.46,3540 4927.87,3540 v1(4928.94,3538.94) ; C174.1@4833.46,3930 4927.87,3930 v1(4928.94,3928.94) ; C175.1@4833.46,4320 4927.87,4320 v1(4928.94,4318.94) ; C176.1@4833.46,4710 4927.87,4710 v1(4928.94,4708.94) ; C177.1@4833.46,5100 4927.87,5100 v1(4928.94,5098.94) ; C178.1@4833.46,5490 4927.87,5490 v1(4928.94,5488.94) ; C179.1@4833.46,5880 4927.87,5880 v1(4928.94,5878.94) ; C180.1@4833.46,6270 4927.87,6270 v1(4928.94,6268.94) ; C181.1@4833.46,6660 4927.87,6660 v1(4928.94,6658.94) ; v1(5260,3110) 5300,3150 5380,3150 5403.46,3126.54 C192.1@5420,3126.54 ; C193.1@5426.54,3310 v1(5426.54,3356.54) ; C195.1@5426.54,3700 v1(5426.54,3746.54) ; C197.1@5426.54,4090 v1(5426.54,4136.54) ; C199.1@5426.54,4480 v1(5426.54,4526.54) ; C201.1@5426.54,4870 v1(5426.54,4916.54) ; C203.1@5426.54,5260 v1(5426.54,5306.54) ; C205.1@5426.54,5650 v1(5426.54,5696.54) ; C207.1@5426.54,6040 v1(5426.54,6086.54) ; C209.1@5426.54,6430 v1(5426.54,6476.54) ; C211.1@5426.54,6820 v1(5426.54,6866.54) ; v1(6380,3580) 6433.46,3633.46 C212.1@6460,3633.46 ; v1(6390,4780) 6416.54,4806.54 C213.1@6460,4806.54 ; v1(6400,5460) 6413.46,5446.54 C214.2@6460,5446.54 ; C213.1@6460,4810 C213.1@6470,4800
  other v1: 6340,3300 6340,4080 6340,4860 6340,5640
AVDD: C1.1 C21.1 C22.1 C23.1 C24.1 C25.1 C26.1 C27.1 C28.1 C29.1 C30.1 C66.1 C67.1 C69.1 C70.1 C72.1 C73.1 C75.1 C76.1 C78.1 C79.1 C94.1 C95.1 C101.1 C103.1 C105.1 C107.1 C109.1 C111.1 C113.1 C115.1 C124.1 C125.1 C126.1 C127.1 C128.1 C129.1 C130.1 C131.1 C132.1 C133.1 C134.1 C135.1 C136.1 C137.1 C138.1 C139.1 C140.1 C141.1 C152.1 C153.1 C154.1 C155.1 C156.1 C157.1 C158.1 C159.1 C160.1 C161.1 C182.2 C183.2 C184.2 C185.2 C186.2 C187.2 C188.2 C189.2 C190.2 C191.2 C193.2 C195.2 C197.2 C199.2 C201.2 C203.2 C205.2 C207.2 C209.2 C211.2 L1.2 L2.1 U1.8 U2.8 U3.8 U4.8 U5.8 U6.8 U7.8 U8.8 u9.2 u9.12 u10.2 u10.12 U11.7 U12.7 U13.7 U14.7 U15.7 U16.7 U17.7 U18.7 U19.8 U20.8 U21.8 U22.8 U23.8 U24.8 U25.8 U26.8 U27.8 U28.8 U29.8 U30.8 U31.8 U32.8 U33.8 U34.8 U35.8 U36.8 U37.8 U38.8 U39.10 U39.16 U40.10 U40.16 U41.10 U41.16 U42.10 U42.16 U43.10 U43.16 U44.10 U44.16 U45.10 U45.16 U46.10 U46.16 U47.10 U47.16 U48.10 U48.16 U49.16 U50.16 U51.16 U52.16 U53.16 U54.16 U55.16 U56.16 U57.16 U58.16 U59.7 U60.7 U61.7 U62.7 U63.7 U64.7 U65.7 U66.7 U67.7 U68.7 U69.2 U70.2 U71.2 U72.2 U73.2 U77.4 U78.4 | length 11861.1
  Top Layer w8: U40.16@4310,3770 4380,3770 4390,3760 4390,3630 4376.02,3616.02 U40.10@4328.94,3616.02 ; U41.16@4320,4159.57 4380.43,4159.57 4390,4150 4390,4020 4376.02,4006.02 U41.10@4328.94,4006.02 ; U39.10@4328.94,3226.02 4386.02,3226.02 4390,3230 4390,3370 4380.43,3379.57 U39.16@4339.57,3379.57 ; U42.10@4328.94,4396.02 4376.02,4396.02 4390,4410 4390,4530 4370,4550 U42.16@4340,4550 ; U43.10@4328.94,4786.02 4373.98,4786.02 4390,4770 4390,4710 v1(4370,4690) ; U44.10@4328.94,5176.02 4376.02,5176.02 4390,5190 4390,5320 4380,5330 U44.16@4340,5330 ; U45.10@4328.94,5566.02 4386.02,5566.02 4390,5570 4390,5720 U45.16@4350,5720 ; U46.10@4328.94,5956.02 4386.02,5956.02 4390,5960 4390,6100 4380,6110 U46.16@4340,6110 ; U47.10@4328.94,6346.02 4376.02,6346.02 4390,6360 4390,6480 4370.43,6499.57 U47.16@4328.94,6499.57
  Top Layer w10: v1(2780,4810) 2795.59,4794.41 u10.12@2851.06,4794.41 ; v1(2784.41,5154.41) u9.12@2851.06,5154.41 ; u10.2@3108.94,4768.82 3161.18,4768.82 v1(3180,4750) ; u9.2@3108.94,5128.82 v1(3178.82,5128.82) ; v1(3420,3320) 3446.85,3293.15 U19.8@3460,3293.15 U19.8@3460,3300 ; v1(3420,3710) 3446.85,3683.15 U20.8@3460,3683.15 U20.8@3460,3690 ; v1(3420,4100) 3446.85,4073.15 U21.8@3460,4073.15 U21.8@3460,4080 ; v1(3420,4490) 3446.85,4463.15 U22.8@3460,4463.15 U22.8@3460,4470 ; v1(3420,4880) 3446.85,4853.15 U23.8@3460,4853.15 U23.8@3460,4860 ; v1(3420,5270) 3446.85,5243.15 U24.8@3460,5243.15 U24.8@3460,5250 ; v1(3420,5660) 3446.85,5633.15 U25.8@3460,5633.15 U25.8@3460,5640 ; v1(3420,6050) 3446.85,6023.15 U26.8@3460,6023.15 U26.8@3460,6030 ; v1(3420,6440) 3446.85,6413.15 U27.8@3460,6413.15 U27.8@3460,6420 ; v1(3420,6830) 3446.85,6803.15 U28.8@3460,6803.15 U28.8@3460,6810 ; v1(3800,3290) 3803.15,3293.15 U30.8@3840,3293.15 ; v1(3800,3680) 3803.15,3683.15 U31.8@3840,3683.15 ; v1(3800,4070) 3803.15,4073.15 U32.8@3840,4073.15 ; v1(3800,4460) 3803.15,4463.15 U33.8@3840,4463.15 ; v1(3800,4850) 3803.15,4853.15 U34.8@3840,4853.15 ; v1(3800,5240) 3803.15,5243.15 U29.8@3840,5243.15 ; v1(3800,5630) 3803.15,5633.15 U35.8@3840,5633.15 ; v1(3800,6020) 3803.15,6023.15 U36.8@3840,6023.15 ; v1(3800,6410) 3803.15,6413.15 U37.8@3840,6413.15 ; v1(3800,6800) 3803.15,6803.15 U38.8@3840,6803.15 ; v1(4260.43,3379.57) U39.16@4339.57,3379.57 ; v1(4260.43,6889.57) 4380.43,6889.57 4390,6880 4390,6750 4376.02,6736.02 U48.10@4328.94,6736.02 ; v1(4270,4190) 4300.43,4159.57 U41.16@4320,4159.57 ; v1(4280,4590) 4320.43,4549.57 U42.16@4328.94,4549.57 ; v1(4280,5760) 4320.43,5719.57 U45.16@4328.94,5719.57 ; v1(4280,6530) 4310.43,6499.57 U47.16@4328.94,6499.57 ; v1(4290,5360) 4320.43,5329.57 U44.16@4328.94,5329.57 ; v1(4290,6140) 4320,6110 U46.16@4330,6110 ; v1(4300,3800) 4328.94,3771.06 U40.16@4328.94,3769.57 ; U43.16@4328.94,4939.57 v1(4328.94,4968.94) ; C67.1@5923.46,3230 5930,3230 v1(5970,3190) 6000,3190 ; C70.1@5923.46,4010 5930,4010 v1(5970,3970) 6000,3970 ; C73.1@5923.46,4790 5930,4790 v1(5970,4750) 6000,4750 ; C76.1@5923.46,5570 5930,5570 v1(5970,5530) 6000,5530 ; C79.1@5923.46,6350 5930,6350 v1(5970,6310) 6000,6310 ; C66.1@5930.94,3110 5930.94,3110.94 6001.42,3181.42 U69.2@6001.42,3248.58 ; C69.1@5930.94,3890 5930.94,3890.94 6001.42,3961.42 U70.2@6001.42,4028.58 ; C72.1@5930.94,4670 5930.94,4670.94 6001.42,4741.42 U71.2@6001.42,4808.58 ; C75.1@5930.94,5450 5930.94,5450.94 6001.42,5521.42 U72.2@6001.42,5588.58 ; C78.1@5930.94,6230 5930.94,6230.94 6001.42,6301.42 U73.2@6001.42,6368.58 ; U78.4@6644.8,6840.24 6661.58,6823.46 C95.1@6730,6823.46
  Top Layer w16: v1(2511.89,4661.89) C1.1@2560,4661.89 ; C1.1@2560,4670 v1(2610,4670) ; U1.8@2822.36,3325 2825,3325 v1(2860,3360) ; U2.8@2822.36,3715 2825,3715 v1(2860,3750) ; U3.8@2822.36,4105 2825,4105 v1(2860,4140) ; U4.8@2822.36,4495 2825,4495 v1(2860,4530) ; U5.8@2822.36,5665 2825,5665 v1(2860,5700) ; U6.8@2822.36,6055 2825,6055 v1(2860,6090) ; U7.8@2822.36,6445 2825,6445 v1(2860,6480) ; U8.8@2822.36,6835 2825,6835 v1(2860,6870) ; U11.7@3245,3113.86 3245,3145 v1(3260,3160) ; U12.7@3245,3503.86 3245,3535 v1(3260,3550) ; U13.7@3245,3893.86 3245,3925 v1(3260,3940) ; U14.7@3245,4283.86 3245,4315 v1(3260,4330) ; U15.7@3245,5453.86 3245,5485 v1(3260,5500) ; U16.7@3245,5843.86 3245,5875 v1(3260,5890) ; U17.7@3245,6233.86 3245,6265 v1(3260,6280) ; U18.7@3245,6623.86 3245,6655 v1(3260,6670) ; C21.1@3740,3305.12 3784.88,3305.12 v1(3800,3290) ; C22.1@3740,3695.12 3784.88,3695.12 v1(3800,3680) ; C23.1@3740,4085.12 3784.88,4085.12 v1(3800,4070) ; C24.1@3740,4475.12 3784.88,4475.12 v1(3800,4460) ; C25.1@3740,4865.12 3784.88,4865.12 v1(3800,4850) ; C26.1@3740,5255.12 3784.88,5255.12 v1(3800,5240) ; C27.1@3740,5645.12 3784.88,5645.12 v1(3800,5630) ; C28.1@3740,6035.12 3784.88,6035.12 v1(3800,6020) ; C29.1@3740,6425.12 3784.88,6425.12 v1(3800,6410) ; C30.1@3740,6815.12 3784.88,6815.12 v1(3800,6800) ; U49.16@4928.94,3359.57 4929.57,3359.57 v1(4960,3390) ; U50.16@4928.94,3749.57 4929.57,3749.57 v1(4960,3780) ; U51.16@4928.94,4139.57 4929.57,4139.57 v1(4960,4170) ; U52.16@4928.94,4529.57 4929.57,4529.57 v1(4960,4560) ; U53.16@4928.94,4919.57 4929.57,4919.57 v1(4960,4950) ; U54.16@4928.94,5309.57 4929.57,5309.57 v1(4960,5340) ; U55.16@4928.94,5699.57 4929.57,5699.57 v1(4960,5730) ; U56.16@4928.94,6089.57 4929.57,6089.57 v1(4960,6120) ; U57.16@4928.94,6479.57 4929.57,6479.57 v1(4960,6510) ; U58.16@4928.94,6869.57 4929.57,6869.57 v1(4960,6900) ; v1@5547.2,3292.8 U59.7@5601.69,3292.8 ; v1@5547.2,3682.8 U60.7@5601.69,3682.8 ; v1@5547.2,4072.8 U61.7@5601.69,4072.8 ; v1@5547.2,4462.8 U62.7@5601.69,4462.8 ; v1@5547.2,4852.8 U63.7@5601.69,4852.8 ; v1@5547.2,5242.8 U64.7@5601.69,5242.8 ; v1@5547.2,5632.8 U65.7@5601.69,5632.8 ; v1@5547.2,6022.8 U66.7@5601.69,6022.8 ; v1@5547.2,6412.8 U67.7@5601.69,6412.8 ; v1@5547.2,6802.8 U68.7@5601.69,6802.8
  Top Layer w20: U77.4@6634.8,6310.24 6644.57,6320 v1(6670,6320) 6696.54,6293.46 C94.1@6720,6293.46
  Top Layer w30: v1(6780,6170) 6810,6200 v1(6990,6200) ; v1(6890,6100) 6891,6101 v1(6891,6309) ; L2.1@6940,6440 v1(7040,6440)
  Bottom Layer w10: C101.1@2813.46,3330 2843.46,3360 v1(2860,3360) ; C103.1@2813.46,3720 2843.46,3750 v1(2860,3750) ; C105.1@2813.46,4110 2843.46,4140 v1(2860,4140) ; C107.1@2813.46,4500 2843.46,4530 v1(2860,4530) ; C109.1@2813.46,5670 2843.46,5700 v1(2860,5700) ; C111.1@2813.46,6060 2843.46,6090 v1(2860,6090) ; C113.1@2813.46,6450 2843.46,6480 v1(2860,6480) ; C115.1@2813.46,6840 2843.46,6870 v1(2860,6870)
  Bottom Layer w16: v1(3260,3160) 3260,3116.54 C124.1@3266.54,3110 ; v1(3260,3550) 3260,3506.54 C125.1@3266.54,3500 ; v1(3260,3940) 3260,3896.54 C126.1@3266.54,3890 ; v1(3260,4330) 3260,4286.54 C127.1@3266.54,4280 ; v1(3260,5500) 3260,5456.54 C128.1@3266.54,5450 ; v1(3260,5890) 3260,5846.54 C129.1@3266.54,5840 ; v1(3260,6280) 3260,6236.54 C130.1@3266.54,6230 ; v1(3260,6670) 3260,6626.54 C131.1@3266.54,6620 ; v1(3420,3320) 3456.54,3320 C132.1@3466.54,3330 ; v1(3420,3710) 3456.54,3710 C133.1@3466.54,3720 ; v1(3420,4100) 3456.54,4100 C134.1@3466.54,4110 ; v1(3420,4490) 3456.54,4490 C135.1@3466.54,4500 ; v1(3420,4880) 3456.54,4880 C136.1@3466.54,4890 ; v1(3420,5270) 3456.54,5270 C137.1@3466.54,5280 ; v1(3420,5660) 3456.54,5660 C138.1@3466.54,5670 ; v1(3420,6050) 3456.54,6050 C139.1@3466.54,6060 ; v1(3420,6440) 3456.54,6440 C140.1@3466.54,6450 ; v1(3420,6830) 3456.54,6830 C141.1@3466.54,6840 ; C152.1@3793.46,3330 3793.46,3296.54 v1(3800,3290) ; C153.1@3793.46,3720 3793.46,3686.54 v1(3800,3680) ; C154.1@3793.46,4110 3793.46,4076.54 v1(3800,4070) ; C155.1@3793.46,4500 3793.46,4466.54 v1(3800,4460) ; C156.1@3793.46,4890 3793.46,4856.54 v1(3800,4850) ; C157.1@3793.46,5280 3793.46,5246.54 v1(3800,5240) ; C158.1@3793.46,5670 3793.46,5636.54 v1(3800,5630) ; C159.1@3793.46,6060 3793.46,6026.54 v1(3800,6020) ; C160.1@3793.46,6450 3793.46,6416.54 v1(3800,6410) ; C161.1@3793.46,6840 3793.46,6806.54 v1(3800,6800) ; C182.2@4913.46,3390 v1(4960,3390) ; C183.2@4913.46,3780 v1(4960,3780) ; C184.2@4913.46,4170 v1(4960,4170) ; C185.2@4913.46,4560 v1(4960,4560) ; C186.2@4913.46,4950 v1(4960,4950) ; C187.2@4913.46,5340 v1(4960,5340) ; C188.2@4913.46,5730 v1(4960,5730) ; C189.2@4913.46,6120 v1(4960,6120) ; C190.2@4913.46,6510 v1(4960,6510) ; C191.2@4913.46,6900 v1(4960,6900) ; C193.2@5493.46,3310 5530,3310 v1@5547.2,3292.8 ; C195.2@5493.46,3700 5530,3700 v1@5547.2,3682.8 ; C197.2@5493.46,4090 5530,4090 v1@5547.2,4072.8 ; C199.2@5493.46,4480 5530,4480 v1@5547.2,4462.8 ; C201.2@5493.46,4870 5530,4870 v1@5547.2,4852.8 ; C203.2@5493.46,5260 5530,5260 v1@5547.2,5242.8 ; C205.2@5493.46,5650 5530,5650 v1@5547.2,5632.8 ; C207.2@5493.46,6040 5530,6040 v1@5547.2,6022.8 ; C209.2@5493.46,6430 5530,6430 v1@5547.2,6412.8 ; C211.2@5493.46,6820 5530,6820 v1@5547.2,6802.8
  other v1: 5540,3300 5540,3690 5540,4080 5540,4470 5540,4860 5540,5250 5540,5640 5540,6030 5540,6420 5540,6810 6676.54,6823.46